# EAGLE board StepperDriver Rev0.1 (EAGLE 6.1)
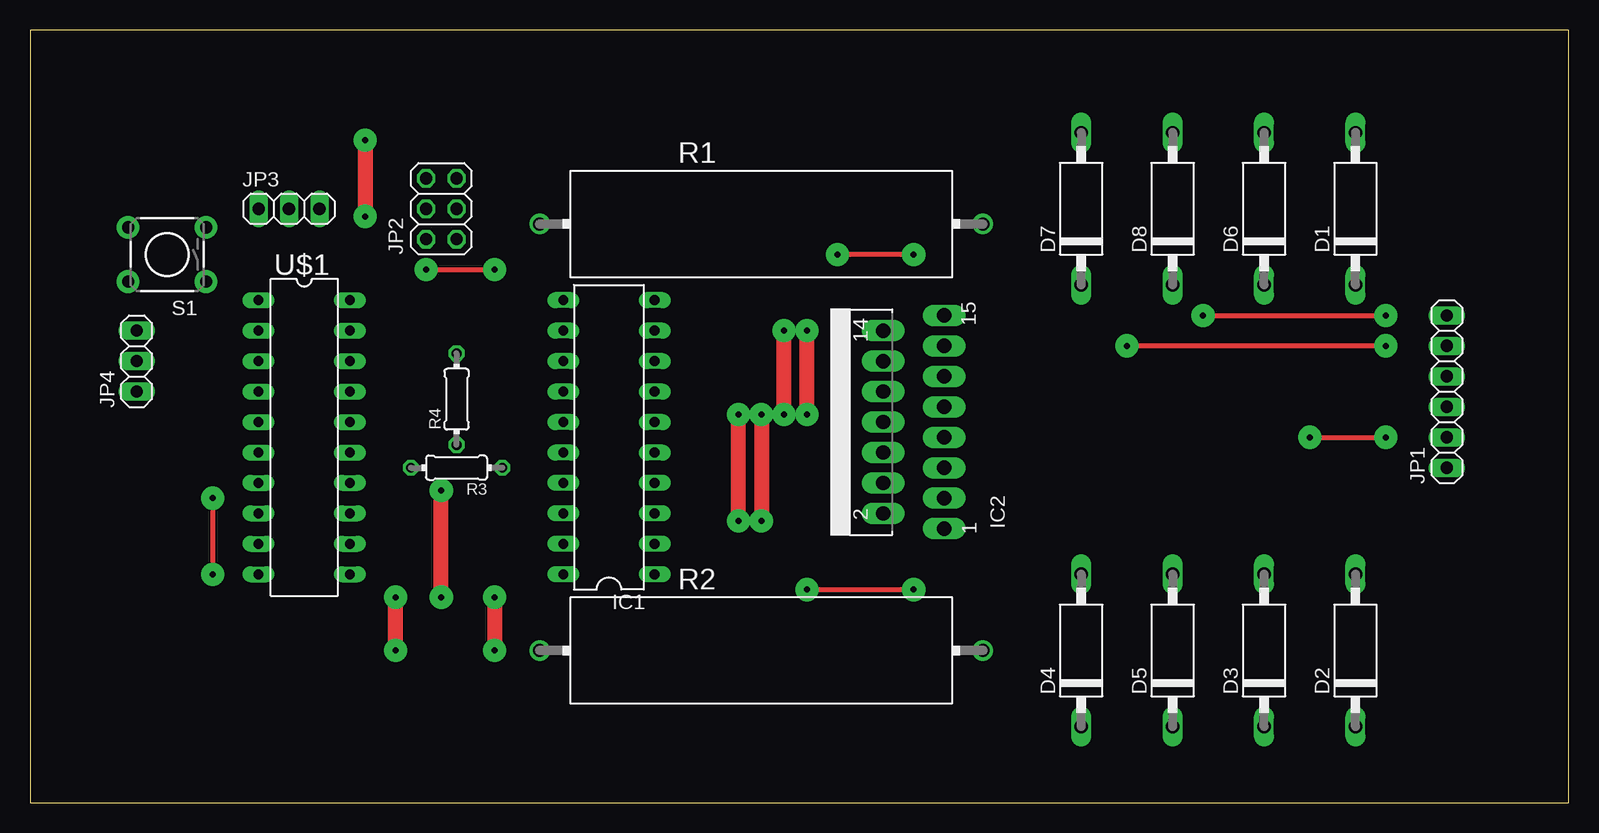
[diagram p0: board, top side]
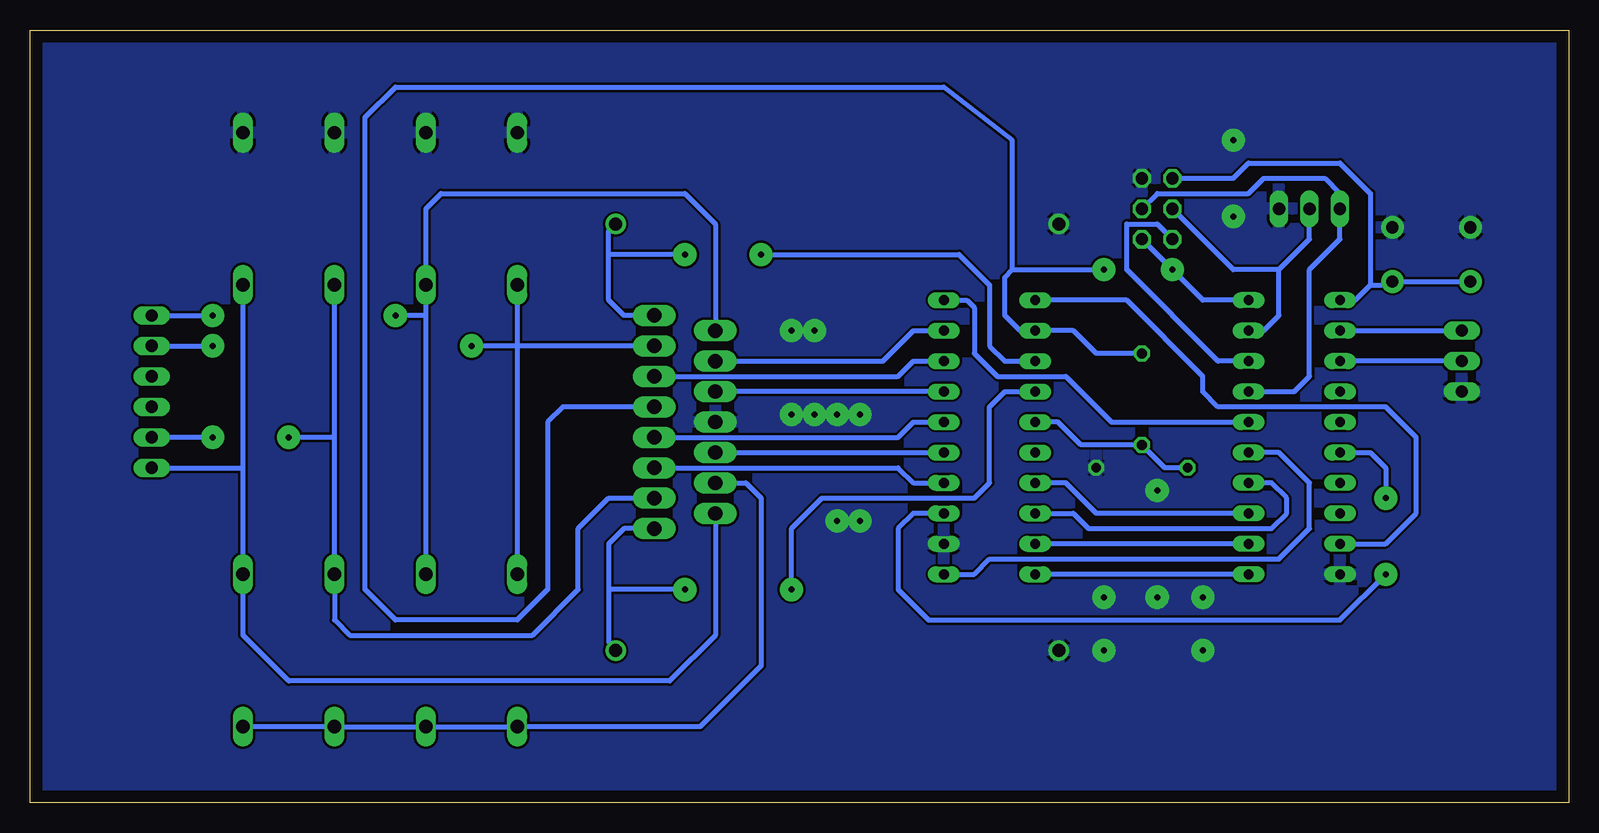
[diagram p1: board, bottom side, seen from below]

Size 128.25 x 64.44 mm. Coordinates in mm from the lower left corner, seen from the top.
Outline: 0,0 128.25,0 128.25,64.44 0,64.44 0,0
Copper layers (1*16): Top 0.035mm / dielectric 1.5mm / Bottom 0.035mm
Design rules: minimum track width 10mil, minimum drill 24mil, track to track 8mil, track to pad 8mil, pad to pad 8mil, via to via 8mil, smd to smd 8mil, copper to edge 40mil, drill to drill 8mil, minimum pad ring 10mil, minimum via ring 8mil, stop-mask expansion 4mil, vias tented up to drill 0mil, thermal gap 10mil

## Footprints (pad centres in the part's own frame; a part is rotated, then mirrored left to right if it is on the bottom)
DO15-12 = drill 1.118 long: A 6.35,0; C -6.35,0
DIL20 = drill 0.813 long: 1 -11.43,-3.81; 2 -8.89,-3.81; 3 -6.35,-3.81; 4 -3.81,-3.81; 5 -1.27,-3.81; 6 1.27,-3.81; 7 3.81,-3.81; 8 6.35,-3.81; 9 8.89,-3.81; 10 11.43,-3.81; 11 11.43,3.81; 12 8.89,3.81; 13 6.35,3.81; 14 3.81,3.81; 15 1.27,3.81; 16 -1.27,3.81; 17 -3.81,3.81; 18 -6.35,3.81; 19 -8.89,3.81; 20 -11.43,3.81
MULTIWATT-15 = drill 1.2 long: 1 -8.89,-7.62; 2 -7.62,-2.54; 3 -6.35,-7.62; 4 -5.08,-2.54; 5 -3.81,-7.62; 6 -2.54,-2.54; 7 -1.27,-7.62; 8 0,-2.54; 9 1.27,-7.62; 10 2.54,-2.54; 11 3.81,-7.62; 12 5.08,-2.54; 13 6.35,-7.62; 14 7.62,-2.54; 15 8.89,-7.62
1X06 = drill 1.016 long: 1 -6.35,0; 2 -3.81,0; 3 -1.27,0; 4 1.27,0; 5 3.81,0; 6 6.35,0
2X03 = drill 1.016 octagon: 1 -2.54,-1.27; 2 -2.54,1.27; 3 0,-1.27; 4 0,1.27; 5 2.54,-1.27; 6 2.54,1.27
1X03 = drill 1.016 long: 1 -2.54,0; 2 0,0; 3 2.54,0
HPS932 = drill 1.1 pad 1.7: 1 -18.47,0; 2 18.47,0
0204/7 = drill 0.813 octagon: 1 -3.81,0; 2 3.81,0
TACTILE-PTH = drill 1.016 pad 1.88: 1 -3.251,2.261; 2 3.251,2.261; 3 -3.251,-2.261; 4 3.251,-2.261

## Placement (x,y rotation side)
D1  1N5060GP  [DO15-12]  110.49,49.53 90 top
D2  1N5060GP  [DO15-12]  110.49,12.7 90 top
D3  1N5060GP  [DO15-12]  102.87,12.7 90 top
D4  1N5060GP  [DO15-12]  87.63,12.7 90 top
D5  1N5060GP  [DO15-12]  95.25,12.7 90 top
D6  1N5060GP  [DO15-12]  102.87,49.53 90 top
D7  1N5060GP  [DO15-12]  87.63,49.53 90 top
D8  1N5060GP  [DO15-12]  95.25,49.53 90 top
IC1  L297  [DIL20]  48.26,30.48 90 top
IC2  L298  [MULTIWATT-15]  68.58,31.75 90 top
JP1  MOTOR  [1X06]  118.11,34.29 90 top
JP2  ISP  [2X03]  34.29,49.53 90 top
JP3  I2C  [1X03]  21.59,49.53 0 top
JP4  SERIAL  [1X03]  8.89,36.83 90 top
R1  0.47  [HPS932]  60.96,48.26 0 top
R2  0.47  [HPS932]  60.96,12.7 0 top
R3  1K  [0204/7]  35.56,27.94 180 top
R4  10K  [0204/7]  35.56,33.66 90 top
S1  [TACTILE-PTH]  11.43,45.72 180 top
U$1  TINY2313-*P*  [DIL20]  22.86,30.48 270 top

## Library data of the parts
D1-D8 = diode
IC1 = st-microelectronics; MPN: L297/1; OC_FARNELL: 1094209; OC_NEWARK: 56P8258
IC2 = st-microelectronics; MPN: L298N; OC_FARNELL: 1589425; OC_NEWARK: 32M1527
JP1-JP4 = pinhead
R1 R2 = resistor-power; OC_FARNELL: unknown; OC_NEWARK: unknown
R3 R4 = resistor
S1 = SparkFun-Electromechanical
U$1 = avr-7

## Nets
GND: D1.A D6.A D7.A D8.A IC1.2 IC2.8 JP2.5 JP3.3 JP4.1 R1.1 R2.1 R3.1 S1.3 S1.4 U$1.10
N$2: IC1.13 IC2.15 R1.2
N$4: IC1.14 IC2.1 R2.2
N$6: IC1.10 U$1.16
N$7: D2.C D3.C D4.C D5.C IC2.4
N$9: IC1.18 U$1.14
N$10: IC1.17 U$1.13
N$11: IC1.20 U$1.11
N$13: IC1.1 U$1.15
N$15: IC1.19 U$1.12
N$18: IC1.12 IC2.9 JP2.1 R4.2 U$1.20
N$19: D4.A D7.C IC2.13 JP1.5
N$21: IC1.4 IC2.5
N$22: JP4.2 U$1.3
N$23: IC1.15 R3.2 R4.1
N$24: JP4.3 U$1.2
N$25: JP2.3 JP3.1 U$1.17
N$26: JP2.2 U$1.18
N$27: JP2.4 JP3.2 U$1.19
N$28: D1.C D2.A IC2.2 JP1.1
N$29: IC1.5 IC2.6
N$30: IC1.3 U$1.6
N$32: JP2.6 S1.1 S1.2 U$1.1
N$33: IC1.6 IC2.7
N$34: IC1.7 IC2.10
N$35: D5.A D8.C IC2.14 JP1.6
N$36: IC1.8 IC2.11
N$37: IC1.9 IC2.12
N$38: D3.A D6.C IC2.3 JP1.2
N$39: IC1.11 U$1.9

## Tracks (layer width: path | path; a pad name or v marks a point on that pad's centre or on a via)
GND  (via drill 0.5 pad 1.93)
  Top 1.27: v59.05,23.5 v59.05,32.38 | v60.96,32.38 v60.96,23.5 | v62.87,32.38 v62.87,39.37 | v64.77,32.38 v64.77,39.37 | v27.94,55.24 v27.94,48.9 | v30.48,12.7 v30.48,17.14 | v38.73,17.14 v38.73,12.7 | v34.29,17.14 v34.29,26.04
  pour Bottom: -33.02,68.58 127,68.58 127,-12.7 -33.02,-12.7
N$2  (via drill 0.5 pad 1.93)
  Top 0.406: v73.66,45.72 v67.31,45.72
  Bottom 0.406: IC2.15 78.74,40.64 80.01,41.91 80.01,45.72 | 80.01,45.72 80.01,47.68 R1.2 | v73.66,45.72 80.01,45.72 | v67.31,45.72 50.8,45.72 48.26,43.18 48.26,38.1 46.99,36.83 IC1.13
N$4  (via drill 0.5 pad 1.93)
  Top 0.406: v64.77,17.78 v73.66,17.78
  Bottom 0.406: v64.77,17.78 64.77,22.86 62.23,25.4 49.53,25.4 48.26,26.67 48.26,33.02 46.99,34.29 IC1.14 | IC2.1 78.74,22.86 80.01,21.59 80.01,17.78 | 80.01,17.78 80.01,13.39 R2.2 | v73.66,17.78 80.01,17.78
N$6
  Bottom 0.406: IC1.10 50.16,41.91 49.53,41.27 49.53,37.47 47.62,35.56 41.91,35.56 38.1,31.75 U$1.16
N$7
  Bottom 0.406: D2.C D3.C D5.C D4.C 72.39,6.35 67.31,11.43 67.31,25.4 68.58,26.67 IC2.4
N$9
  Bottom 0.406: IC1.18 41.27,24.13 40.01,22.86 24.77,22.86 23.5,24.13 23.5,25.4 24.77,26.67 U$1.14
N$10
  Bottom 0.406: U$1.13 39.37,24.13 41.91,26.67 IC1.17
N$11
  Bottom 0.406: U$1.11 IC1.20
N$13
  Bottom 0.406: IC1.1 49.53,19.05 48.26,20.32 24.13,20.32 21.59,22.86 21.59,26.67 24.13,29.21 U$1.15
N$15
  Bottom 0.406: U$1.12 IC1.19
N$18  (via drill 0.5 pad 1.93)
  Top 0.406: v33.02,44.45 v38.73,44.45
  Bottom 0.406: IC2.9 83.82,33.02 85.09,31.75 85.09,17.78 87.63,15.24 97.79,15.24 100.33,17.78 100.33,57.15 97.79,59.69 52.07,59.69 46.35,55.24 46.35,44.45 | U$1.20 30.48,41.91 v33.02,44.45 JP2.1 | 46.35,44.45 46.99,43.81 46.99,40.64 45.72,39.37 IC1.12 41.27,39.37 39.37,37.47 R4.2 | 46.35,44.45 v38.73,44.45
N$19  (via drill 0.5 pad 1.93)
  Top 0.406: v113.03,38.1 v91.44,38.1
  Bottom 0.406: D7.C 87.63,38.1 | 87.63,38.1 D4.A | IC2.13 87.63,38.1 | 87.63,38.1 v91.44,38.1 | JP1.5 v113.03,38.1
N$21
  Bottom 0.406: IC2.5 55.88,27.94 54.61,26.67 IC1.4
N$22
  Bottom 0.406: JP4.2 U$1.3
N$23
  Bottom 0.406: R3.2 33.66,27.94 R4.1 40.64,29.84 42.55,31.75 IC1.15
N$24
  Bottom 0.406: U$1.2 JP4.3
N$25
  Bottom 0.406: U$1.17 22.86,34.29 21.59,35.56 21.59,44.45 19.05,46.99 JP3.1 19.05,50.8 20.32,52.07 25.4,52.07 26.67,50.8 34.29,50.8 JP2.3
N$26
  Bottom 0.406: U$1.18 29.21,36.83 36.83,44.45 36.83,48.26 34.29,48.26 JP2.2
N$27
  Bottom 0.406: U$1.19 25.4,39.37 24.13,40.64 24.13,44.45 | 24.13,44.45 21.59,46.99 JP3.2 | 24.13,44.45 27.94,44.45 JP2.4
N$28
  Bottom 0.406: 110.49,27.94 D2.A 110.49,13.97 106.68,10.16 74.93,10.16 71.12,13.97 IC2.2 | 110.49,27.94 D1.C | JP1.1 110.49,27.94
N$29
  Bottom 0.406: IC2.6 IC1.5
N$30  (via drill 0.5 pad 1.93)
  Top 0.406: v15.24,25.4 v15.24,19.05
  Bottom 0.406: IC1.3 54.61,24.13 55.88,22.86 55.88,17.78 53.34,15.24 19.05,15.24 v15.24,19.05 | U$1.6 16.51,29.21 15.24,27.94 v15.24,25.4
N$32
  Bottom 0.406: U$1.1 17.78,41.91 16.51,43.18 | 16.51,43.18 14.96,43.18 S1.1 S1.2 | JP2.6 27.94,52.07 26.67,53.34 19.05,53.34 16.51,50.8 16.51,43.18
N$33
  Bottom 0.406: IC2.7 55.88,30.48 54.61,31.75 IC1.6
N$34
  Bottom 0.406: IC1.7 IC2.10
N$35  (via drill 0.5 pad 1.93)
  Top 0.406: v97.79,40.64 v113.03,40.64
  Bottom 0.406: D5.A 95.25,40.64 | 95.25,40.64 D8.C 95.25,49.53 93.98,50.8 73.66,50.8 71.12,48.26 IC2.14 | 95.25,40.64 v97.79,40.64 | JP1.6 v113.03,40.64
N$36
  Bottom 0.406: IC2.11 55.88,35.56 54.61,36.83 IC1.8
N$37
  Bottom 0.406: IC2.12 57.15,36.83 54.61,39.37 IC1.9
N$38  (via drill 0.5 pad 1.93)
  Top 0.406: v106.68,30.48 v113.03,30.48
  Bottom 0.406: 102.87,30.48 D3.A 102.87,15.24 101.6,13.97 86.36,13.97 82.55,17.78 82.55,22.86 80.01,25.4 IC2.3 | 102.87,30.48 D6.C | 102.87,30.48 v106.68,30.48 | v113.03,30.48 JP1.2
N$39
  Bottom 0.406: U$1.9 15.24,21.59 12.7,24.13 12.7,30.48 15.24,33.02 29.21,33.02 30.48,34.29 30.48,35.56 36.83,41.91 IC1.11